# EAGLE board ATmega128RFA1-DevBoard (EAGLE 7.5.0)
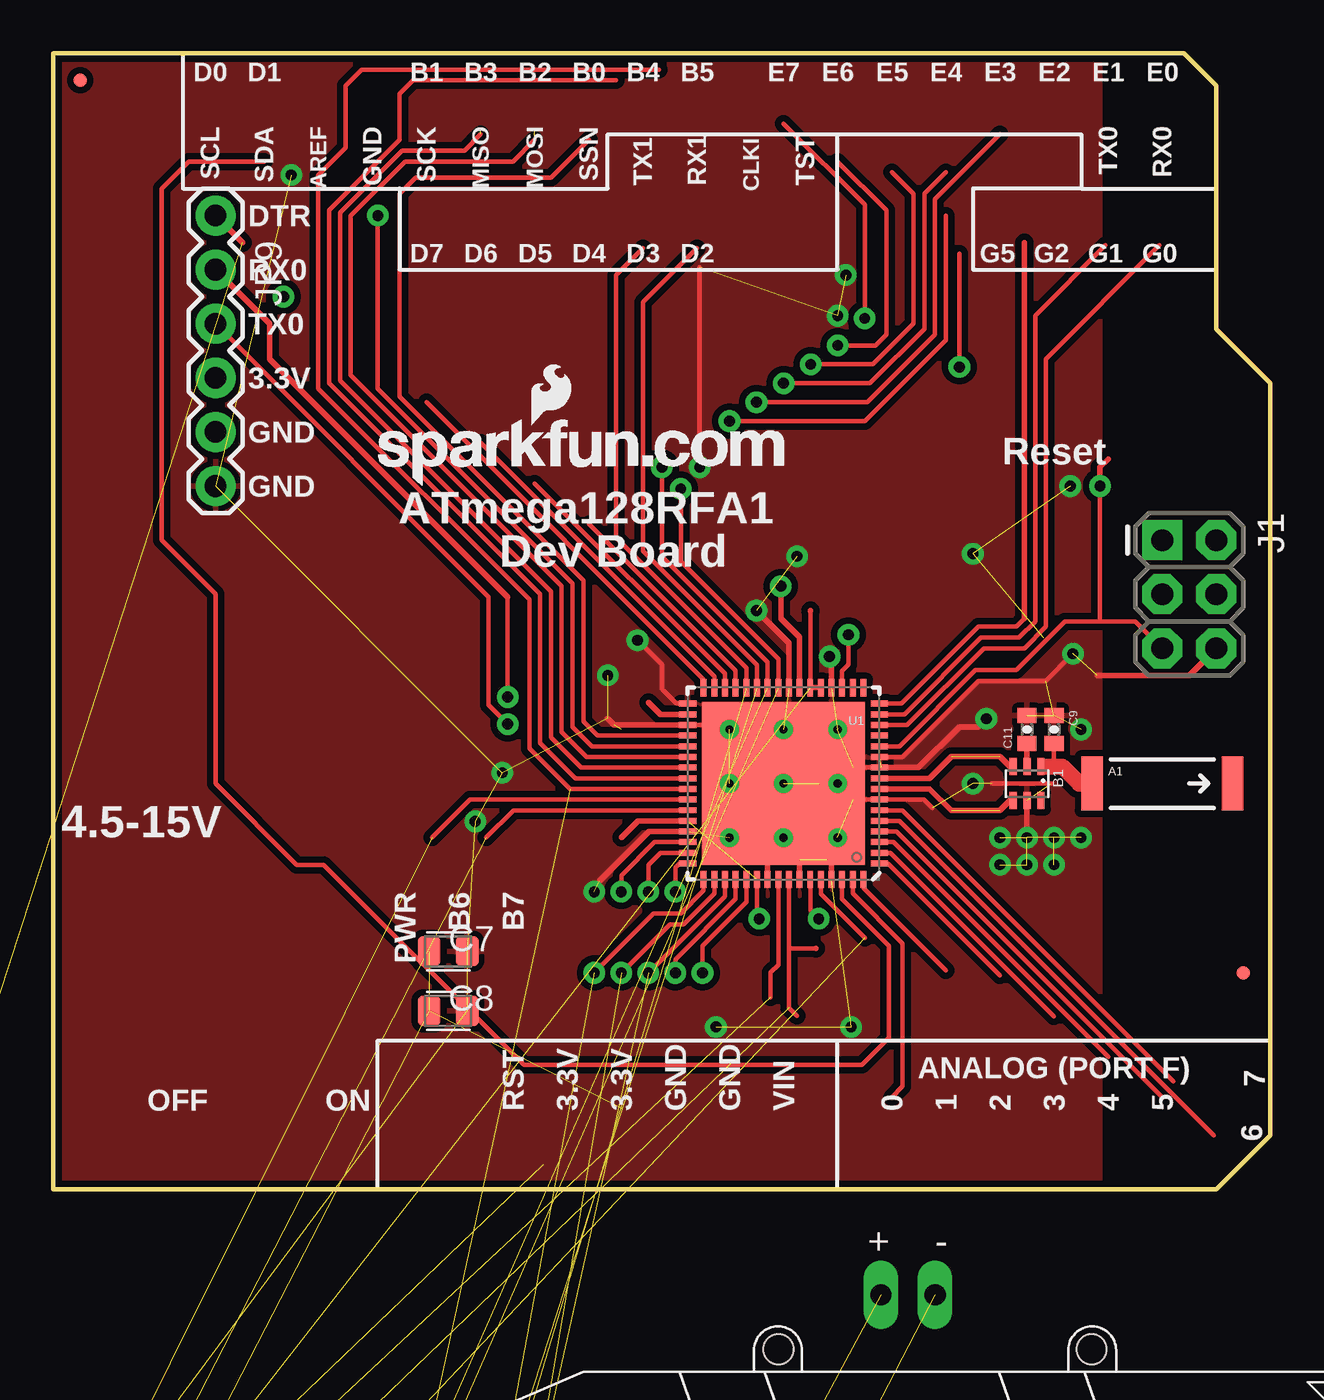
[diagram p0: board, top side]
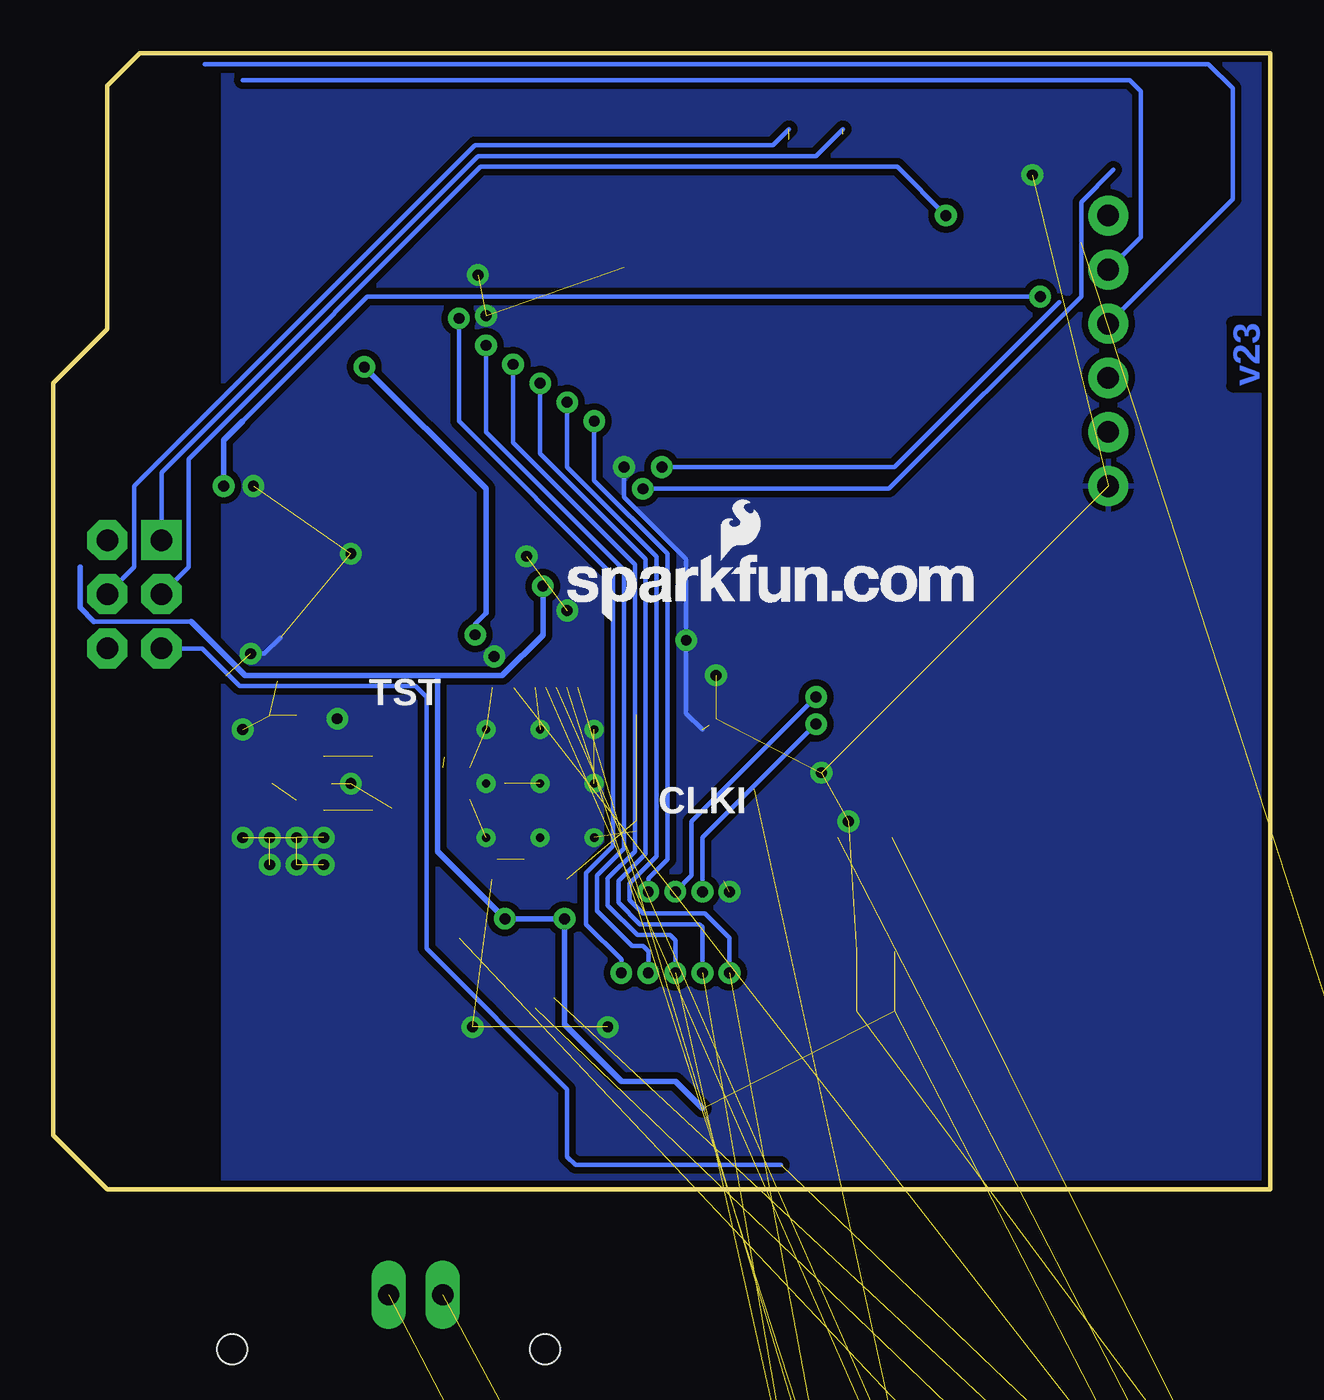
[diagram p1: board, bottom side, seen from below]

Size 57.15 x 53.34 mm. Coordinates in mm from the lower left corner, seen from the top.
Outline: 0,53.34 0,0 54.61,0 57.15,2.54 57.15,37.85 54.61,40.39 54.61,51.82 53.09,53.34 0,53.34
Copper layers (1*16): Top 0.035mm / dielectric 1.5mm / Bottom 0.035mm
Design rules "SparkFun": minimum track width 7mil, minimum drill 15mil, track to track 8mil, track to pad 8mil, pad to pad 8mil, via to via 8mil, smd to smd 8mil, copper to edge 8mil, drill to drill 8mil, minimum pad ring 12mil, minimum via ring 10mil, stop-mask expansion 4mil, vias tented up to drill 20mil, thermal gap 10mil
Net classes: 1 HighAmps: width 0.762 mm

## Footprints (pad centres in the part's own frame; a part is rotated, then mirrored left to right if it is on the bottom)
ANTENNA-CHIP5 = smd 1.016 x 2.54: FEED -3.302,0; NC 3.302,0
BALUN = smd 0.35 x 0.8: 1 -0.65,-0.8; 2 0,-0.8; 3 0.65,-0.8; 4 0.65,0.8; 5 0,0.8; 6 -0.65,0.8
BATTERY-W/HOLDER-380MAH-HUBSAN = drill 1 long: + -2.54,14.605; - 0,14.605 | hole 1.4: -7.35,-12.05; -7.35,12.05; 7.35,-12.05; 7.35,12.05
CAPC2012X140_HS = smd 1.08 x 1.42: 1 -0.895,0; 2 0.895,0
0402-CAP = smd 0.7 x 0.9: 1 -0.65,0; 2 0.65,0
C0402 = smd 0.635 x 0.635: 1 0,0.445; 2 0,-0.445
AVX-B = smd 1.143 x 2.286: + -1.46,0; - 1.46,0
C0603 = smd 0.889 x 0.889: 1 0,0.762; 2 0,-0.762
LEDSC125X200X120-2_HS = smd 0.94 x 0.99: A 1.045,0; C -1.045,0
DO-214AA = smd 2.159 x 2.743: + -2.21,0; - 2.21,0
MICRO-FIDUCIAL = smd 0.635 x 0.635: 1 0,0
2X3-NS = drill 1.016 pad 1.88 square: 1 -2.54,-1.27 | drill 1.016 pad 1.88 octagon: 2 -2.54,1.27; 3 0,-1.27; 4 0,1.27; 5 2.54,-1.27; 6 2.54,1.27
MALE_HEADER_2X1_0.1IN = drill 1.1 pad 1.65 square: 1 0,0 | drill 1.1 pad 1.65: 2 2.54,0
FTDI_BASIC = drill 1.016 pad 1.88: CTS 10.16,0; DTR 0,0; GND 12.7,0; RXI 2.54,0; TXO 5.08,0; VCC 7.62,0
MOTOR_PADS = smd 2 x 2: V+ -1,0; V- 2,0
SOT-23 = smd 1.016 x 1.143: 1 -0.889,-1.016; 2 0.889,-1.016; 3 0,1.016
RESC2012X60_HS = smd 0.92 x 1.38: 1 -0.955,0; 2 0.955,0
R0603 = smd 0.889 x 0.889: 1 0,0.762; 2 0,-0.762
QFN-64 = smd 0.8 x 0.28: 1 -4.5,3.75; 2 -4.5,3.25; 3 -4.5,2.75; 4 -4.5,2.25; 5 -4.5,1.75; 6 -4.5,1.25; 7 -4.5,0.75; 8 -4.5,0.25; 9 -4.5,-0.25; 10 -4.5,-0.75; 11 -4.5,-1.25; 12 -4.5,-1.75; 13 -4.5,-2.25; 14 -4.5,-2.75; 15 -4.5,-3.25; 16 -4.5,-3.75; 33 4.5,-3.75; 34 4.5,-3.25; 35 4.5,-2.75; 36 4.5,-2.25; 37 4.5,-1.75; 38 4.5,-1.25; 39 4.5,-0.75; 40 4.5,-0.25; 41 4.5,0.25; 42 4.5,0.75; 43 4.5,1.25; 44 4.5,1.75; 45 4.5,2.25; 46 4.5,2.75; 47 4.5,3.25; 48 4.5,3.75 | smd 0.28 x 0.8: 17 -3.75,-4.5; 18 -3.25,-4.5; 19 -2.75,-4.5; 20 -2.25,-4.5; 21 -1.75,-4.5; 22 -1.25,-4.5; 23 -0.75,-4.5; 24 -0.25,-4.5; 25 0.25,-4.5; 26 0.75,-4.5; 27 1.25,-4.5; 28 1.75,-4.5; 29 2.25,-4.5; 30 2.75,-4.5; 31 3.25,-4.5; 32 3.75,-4.5; 49 3.75,4.5; 50 3.25,4.5; 51 2.75,4.5; 52 2.25,4.5; 53 1.75,4.5; 54 1.25,4.5; 55 0.75,4.5; 56 0.25,4.5; 57 -0.25,4.5; 58 -0.75,4.5; 59 -1.25,4.5; 60 -1.75,4.5; 61 -2.25,4.5; 62 -2.75,4.5; 63 -3.25,4.5; 64 -3.75,4.5 | smd 7.65 x 7.65: 65 0,0
LGA-24_4X4MM = smd 0.3 x 0.6: P$1 1.25,1.8; P$2 0.75,1.8; P$3 0.25,1.8; P$4 -0.25,1.8; P$5 -0.75,1.8; P$6 -1.25,1.8; P$13 -1.25,-1.8; P$14 -0.75,-1.8; P$15 -0.25,-1.8; P$16 0.25,-1.8; P$17 0.75,-1.8; P$18 1.25,-1.8 | smd 0.6 x 0.3: P$7 -1.8,1.25; P$8 -1.8,0.75; P$9 -1.8,0.25; P$10 -1.8,-0.25; P$11 -1.8,-0.75; P$12 -1.8,-1.25; P$19 1.8,-1.25; P$20 1.8,-0.75; P$21 1.8,-0.25; P$22 1.8,0.25; P$23 1.8,0.75; P$24 1.8,1.25
SOT23-DBV = smd 0.55 x 1.2: 1 -0.95,-1.3; 2 0,-1.3; 3 0.95,-1.3; 4 0.95,1.3; 5 -0.95,1.3
SMD_RESISTOR = smd 0.7 x 1.25: P$1 -1,0; P$2 1,0
CRYSTAL-SMD-5X3 = smd 1.9 x 1.1: 1 -1.85,-1.15; 2 1.85,-1.15; 3 1.85,1.15; 4 -1.85,1.15

## Placement (x,y rotation side)
A1  ANTENNA2SMD5  [ANTENNA-CHIP5]  52.07,19.05 0 top
B1  748421245  [BALUN]  45.72,19.05 180 top
BATT1  BATTERY-HUBSAN-W/HOLDER  [BATTERY-W/HOLDER-380MAH-HUBSAN]  41.4,-19.56 0 top  (outside the outline)
C1  10uF  [CAPC2012X140_HS]  -16,-223.52 0 top  (outside the outline)
C2  10uF  [CAPC2012X140_HS]  -16,-226.31 0 top  (outside the outline)
C3  0.1uF  [CAPC2012X140_HS]  -16,-35.31 0 top  (outside the outline)
C4  12pF  [CAPC2012X140_HS]  -16,-38.1 0 top  (outside the outline)
C5  1uF  [CAPC2012X140_HS]  -16,-43.69 0 top  (outside the outline)
C6  1uF  [CAPC2012X140_HS]  -16,-46.48 0 top  (outside the outline)
C7  1uF  [CAPC2012X140_HS]  18.54,11.18 0 top
C8  1uF  [CAPC2012X140_HS]  18.54,8.38 0 top
C9  0.75pF  [0402-CAP]  46.99,21.59 270 top
C10  0.75pF  [CAPC2012X140_HS]  -16,-229.11 0 top  (outside the outline)
C11  22pF  [0402-CAP]  45.72,21.59 90 top
C14  22pF  [CAPC2012X140_HS]  -16,-231.9 0 top  (outside the outline)
C15  12pF  [CAPC2012X140_HS]  -16,-40.89 0 top  (outside the outline)
C16  1uF  [CAPC2012X140_HS]  -16,-234.7 0 top  (outside the outline)
C17  0.1uF  [CAPC2012X140_HS]  -16,-237.49 0 top  (outside the outline)
C18  0.01uF  [CAPC2012X140_HS]  -16,-80.77 0 top  (outside the outline)
C19  0.1uF  [CAPC2012X140_HS]  -16,-88.39 0 top  (outside the outline)
C20  10uF  [CAPC2012X140_HS]  -16,-91.19 0 top  (outside the outline)
C21  4.7uF  [CAPC2012X140_HS]  -16,-93.98 0 top  (outside the outline)
C22  0.22uF  [CAPC2012X140_HS]  -16,-96.77 0 top  (outside the outline)
C23  1uf  [C0402]  -6.86,-143.26 0 top  (outside the outline)
C24  100uf  [AVX-B]  -15.49,-144.02 0 top  (outside the outline)
C25  1uf  [C0603]  -15.75,-148.59 0 top  (outside the outline)
C26  1uf  [C0402]  -6.86,-165.1 0 top  (outside the outline)
C27  100uf  [AVX-B]  -15.49,-166.12 0 top  (outside the outline)
C28  1uf  [C0603]  -15.75,-170.69 0 top  (outside the outline)
C29  1uf  [C0402]  -6.86,-187.2 0 top  (outside the outline)
C30  100uf  [AVX-B]  -15.49,-188.21 0 top  (outside the outline)
C31  1uf  [C0603]  -15.75,-192.79 0 top  (outside the outline)
C32  1uf  [C0402]  -6.86,-209.3 0 top  (outside the outline)
C33  100uf  [AVX-B]  -15.49,-210.31 0 top  (outside the outline)
C34  1uf  [C0603]  -15.75,-214.88 0 top  (outside the outline)
D1  green  [LEDSC125X200X120-2_HS]  -15.49,-61.98 0 top  (outside the outline)
D2  green  [LEDSC125X200X120-2_HS]  -15.49,-64.77 0 top  (outside the outline)
D3  28V-5A  [DO-214AA]  -8.13,-130.3 0 top  (outside the outline)
D4  28V-5A  [DO-214AA]  -14.48,-153.42 0 top  (outside the outline)
D5  28V-5A  [DO-214AA]  -14.48,-175.51 0 top  (outside the outline)
D6  28V-5A  [DO-214AA]  -14.48,-197.61 0 top  (outside the outline)
FID1  FIDUCIALUFIDUCIAL  [MICRO-FIDUCIAL]  1.27,52.07 0 top
FID2  FIDUCIALUFIDUCIAL  [MICRO-FIDUCIAL]  55.88,10.16 0 top
J1  ISP  [2X3-NS]  53.34,27.94 270 top
J4  [MALE_HEADER_2X1_0.1IN]  -16,-106.93 0 top  (outside the outline)
JP1  FTDI (Serial Only)  [FTDI_BASIC]  -16.51,-123.19 0 top  (outside the outline)
JP4  LOGO-SFENEW  [SFE-NEW-WEBLOGO]  33.02,26.67 0 bottom
JP9  FTDI  [FTDI_BASIC]  7.62,45.72 270 top
JP10  LOGO-SFENEW  [SFE-NEW-WEBLOGO]  15.24,33.02 0 top
PIN_3  MOTOR_PADS  [MOTOR_PADS]  -10.41,-183.13 0 top  (outside the outline)
PIN_4  MOTOR_PADS  [MOTOR_PADS]  -10.41,-205.23 0 top  (outside the outline)
PIN_5  MOTOR_PADS  [MOTOR_PADS]  -10.41,-161.04 0 top  (outside the outline)
PIN_8  MOTOR_PADS  [MOTOR_PADS]  -5.59,-138.94 0 top  (outside the outline)
Q1  CJ2302  [SOT-23]  -15.49,-137.92 0 top  (outside the outline)
Q2  CJ2302  [SOT-23]  -8.64,-153.42 0 top  (outside the outline)
Q3  CJ2302  [SOT-23]  -8.64,-175.51 0 top  (outside the outline)
Q4  CJ2302  [SOT-23]  -8.64,-197.61 0 top  (outside the outline)
R1  10K  [RESC2012X60_HS]  -16,-99.57 0 top  (outside the outline)
R5  10K  [RESC2012X60_HS]  -16,-54.86 0 top  (outside the outline)
R6  10K  [RESC2012X60_HS]  -16,-102.36 0 top  (outside the outline)
R7  330  [RESC2012X60_HS]  -16,-49.28 0 top  (outside the outline)
R8  330  [RESC2012X60_HS]  -16,-52.07 0 top  (outside the outline)
R9  100R  [R0603]  -10.92,-142.75 0 top  (outside the outline)
R10  10K 1/10W  [R0603]  -10.67,-138.68 0 top  (outside the outline)
R11  100R  [R0603]  -10.92,-164.85 0 top  (outside the outline)
R12  10K 1/10W  [R0603]  -15.49,-160.78 0 top  (outside the outline)
R13  100R  [R0603]  -10.92,-186.94 0 top  (outside the outline)
R14  10K 1/10W  [R0603]  -15.49,-182.88 0 top  (outside the outline)
R15  100R  [R0603]  -10.92,-209.04 0 top  (outside the outline)
R16  10K 1/10W  [R0603]  -15.49,-204.98 0 top  (outside the outline)
U1  ATMEGA128RFA1  [QFN-64]  34.29,19.05 180 top
U$1  IMU  [LGA-24_4X4MM]  -15.24,-84.33 0 top  (outside the outline)
U$2  TPS73633-DBVT  [SOT23-DBV]  -15.49,-69.6 0 top  (outside the outline)
U$3  0  [SMD_RESISTOR]  -15.49,-116.33 0 top  (outside the outline)
Y2  [CRYSTAL-SMD-5X3]  -14.73,-58.42 0 top  (outside the outline)

## Library data of the parts
A1 B1 = SparkFun-RF
BATT1 = quadparts_prebuilt
C1 C2 C20 = quadparts_prebuilt; DIST: Digikey; DISTPN: 490-5523-1-ND; MFR: Murata Electronics North America; MPN: GRM21BR61E106KA73L
C3 C17 C19 = quadparts_prebuilt; DIST: Digikey; DISTPN: 490-1666-1-ND; MFR: Murata Electronics North America; MPN: GRM21BR71H104KA01L
C4 C15 = quadparts_prebuilt; DIST: Digikey; DISTPN: 490-5531-1-ND; MFR: Murata Electronics North America; MPN: GRM21A5C2E120JW01D
C5-C8 C16 = quadparts_prebuilt; DIST: Digikey; DISTPN: 490-4736-1-ND; MFR: Murata Electronics North America; MPN: GRM21BR71H105KA12L
C9 C11 = SparkFun-Passives
C10 = quadparts_prebuilt; DIST: Digikey; DISTPN: 490-3585-1-ND; MFR: Murata Electronics North America; MPN: GQM2195C2AR75CB01D
C14 = quadparts_prebuilt; DIST: Digikey; DISTPN: 490-5534-1-ND; MFR: Murata Electronics North America; MPN: GRM21A5C2E220JW01D
C18 = quadparts_prebuilt; DIST: Digikey; DISTPN: 490-8295-1-ND; MFR: Murata Electronics North America; MPN: GRM2195C1H103FA01D
C21 = quadparts_prebuilt; DIST: Digikey; DISTPN: 490-3335-1-ND; MFR: Murata Electronics North America; MPN: GRM21BR61E475KA12L
C22 = quadparts_prebuilt; DIST: Digikey; DISTPN: 490-1670-1-ND; MFR: Murata Electronics North America; MPN: GRM21BR71H224KA01L
C23 C26 C29 C32 = Seeed-Capacitor-2016; MPN: CC0402KRX5R6BB105
C24 C27 C30 C33 = Seeed-Capacitor-2016; MPN: TAJB107M010#NJ
C25 C28 C31 C34 = Seeed-Capacitor-2016; MPN: CC0603KRX7R8BB105
D1 D2 = quadparts_prebuilt; DIST: Digikey; DISTPN: 160-1179-1-ND; MFR: Lite-On Inc; MPN: LTST-C170GKT
D3-D6 = Seeed-Diode-2016; MPN: SS54B
FID1 FID2 JP4 JP10 = SparkFun-Aesthetics
J1 JP1 JP9 = SparkFun-Connectors
J4 = quadparts; CREATOR: SWANSON; DIST: Digikey; DISTPN: 3M9447-ND; MFR: 3M; MPN: 961102-6404-AR
PIN_3-PIN_5 PIN_8 = Andranik-Lab4
Q1-Q4 = Seeed-Transistor-2016; MPN: CJ2302
R1 R5 R6 = quadparts_prebuilt; DIST: Digikey; DISTPN: 311-10KARCT-ND; MFR: Yageo; MPN: RC0805JR-0710KL
R7 R8 = quadparts_prebuilt; DIST: Digikey; DISTPN: 311-330ARCT-ND; MFR: Yageo; MPN: RC0805JR-07330RL
R9 R11 R13 R15 = Seeed-Resistor-2016; MPN: RC0603JR-07100RL
R10 R12 R14 R16 = Seeed-Resistor-2016; MPN: RC0603JR-0710KL
U1 = SparkFun-DigitalIC
U$1 = quadparts; DIST: DIGIKEY; DISTPN: 497-13902-1-ND; MFP: LSM9DS0TR; MFR: STMicroelectronics
U$2 = quadparts_prebuilt; DATASHEET: http://www.ti.com/lit/ds/symlink/lp3985.pdf; DIST: Digikey; DISTPN: LP3985IM5X-3.0/NOPBCT-ND; MFR: Texas Instruments; MPN: LP3985IM5X-3.0/NOPB; PRICE: 0.59
U$3 = quadparts; DIST: DIGIKEY; DISTPN: 311-0.0ARCT-ND; MFR: Yageo; MPN: RC0805JR-070RL
Y2 = quadparts_prebuilt; DATASHEET: http://www.abracon.com/Resonators/abm3b.pdf; DIST: Digikey; DISTPN: 535-9122-1-ND; MFR: Abracon LLC; MPN: ABM3B-16.000MHZ-B2-T; PRICE: 0.68; PROD_ID: XTAL-08218

## Nets
3.3V: C2.1 C7.1 C8.1 C16.1 C19.1 C20.1 R1.1 R5.2 R6.1 U1.23 U1.34 U1.44 U1.54 U1.59 U$1.P$15 U$1.P$16 U$1.P$17 U$1.P$18 U$2.5
A0: U1.63
A1: U1.64
A2: U1.1
A3: U1.2
A4: U1.3
A5: U1.4
A6: U1.5
A7: U1.6
AREF: U1.62
AVDD: C6.1 U1.60
BAT_GND: BATT1.- C23.1 C24.- C26.1 C27.- C29.1 C30.- C32.1 C33.- Q1.2 Q2.2 Q3.2 Q4.2 R10.1 R12.1 R14.1 R16.1 U$3.P$1
DTR: C3.1 JP9.DTR
DVDD: C5.1 U1.21 U1.22
GND: B1.5 C1.2 C2.2 C4.2 C5.2 C6.2 C7.2 C8.2 C9.1 C11.2 C15.2 C16.2 C17.2 C18.2 C19.2 C20.2 C21.1 D1.C D2.C J1.6 JP1.GND JP9.GND U1.7 U1.10 U1.11 U1.20 U1.24 U1.33 U1.35 U1.45 U1.55 U1.58 U1.61 U1.65 U$1.P$2 U$1.P$3 U$1.P$4 U$1.P$5 U$1.P$6 U$1.P$22 U$1.P$23 U$2.2 U$3.P$2
MISO: J1.1 U1.39
MOSI: J1.4 U1.38
N$3: C15.1 U1.57 Y2.3
N$4: C4.1 U1.56 Y2.1
N$5: C18.1 U$2.4
N$6: C21.2 U$1.P$7
N$7: B1.2 C11.1
N$8: D2.A R7.1
N$12: C22.1 U$1.P$8
N$13: D1.A R8.1
N$14: C22.2 U$1.P$9
N$15: R1.2 U$1.P$19
N$16: R6.2 U$1.P$20
N$17: BATT1.+ J4.1
N$18: Q1.1 R9.2 R10.2
N$19 [HighAmps]: C25.1 D3.+ PIN_8.V- Q1.3
N$21: Q2.1 R11.2 R12.2
N$22 [HighAmps]: C28.1 D4.+ PIN_5.V- Q2.3
N$24: Q3.1 R13.2 R14.2
N$25 [HighAmps]: C31.1 D5.+ PIN_3.V- Q3.3
N$27: Q4.1 R15.2 R16.2
N$28 [HighAmps]: C34.1 D6.+ PIN_4.V- Q4.3
PB4: U1.40
PB5: C23.2 R9.1 U1.41
PB6: R7.2 U1.42
PB7: R8.2 U1.43
PD4: U1.29
PD5: U1.30
PD6: U1.31
PD7: U1.32
PE2: U1.48
PE3: C29.2 R13.1 U1.49
PE4: C32.2 R15.1 U1.50
PE5: C26.2 R11.1 U1.51
PE6: U1.52
PE7: U1.53
PG0: U1.14
PG1: U1.15
PG2: U1.16
PG5: U1.19
RESET: C3.2 J1.5 R5.1 U1.12
RFANT: A1.FEED B1.1 C9.2
RFN: B1.3 U1.9
RFP: B1.4 U1.8
RSTON: U1.13
RX0: JP9.TXO U1.46
RX1: JP1.RXI U1.27
SCK: J1.3 U1.37
SCL: U1.25 U$1.P$21
SDA: U1.26 U$1.P$24
SSN: U1.36
TX0: JP9.RXI U1.47
TX1: JP1.TXO U1.28
VCC: C1.1 C17.1 C24.+ C25.2 C27.+ C28.2 C30.+ C31.2 C33.+ C34.2 D3.- D4.- D5.- D6.- J4.2 PIN_3.V+ PIN_4.V+ PIN_5.V+ PIN_8.V+ U$2.1 U$2.3

## Tracks (layer width: path | path; a pad name or v marks a point on that pad's centre or on a via)
3.3V  (via drill 0.51)  (16 unrouted)
  Top 0.203: U1.54 33.04,12.81 v33.15,12.7 | U1.59 35.54,13.1 v35.94,12.7
  Top 0.254: U1.34 28.5,22.3 27.94,22.86 | U1.44 27.46,17.3 26.67,16.51 | U1.23 35.04,25.92 34.16,26.8 v34.16,28.32
  Bottom 0.203: 50.67,26.67 55.24,26.67
  Bottom 0.254: 39.12,24.13 39.12,15.88 v35.94,12.7 v33.15,12.7 33.15,7.75 30.48,5.08 27.94,5.08 26.67,3.81 | 39.12,24.13 36.07,24.13 34.16,26.04 v34.16,28.32 | 39.12,24.13 48.13,24.13 50.67,26.67 | 55.24,26.67 55.88,27.3 55.88,29.21
A0
  Top 0.203: 39.37,4.32 39.88,4.83 39.88,11.56 37.54,13.89 U1.63
A1
  Top 0.203: 41.91,10.29 38.04,14.16 U1.64
A2
  Top 0.203: U1.1 39.18,15.3 44.45,10.03
A3
  Top 0.203: U1.2 39.32,15.8 46.99,8.13
A4
  Top 0.203: U1.3 39.45,16.3 49.53,6.22
A5
  Top 0.203: U1.4 39.59,16.8 52.07,4.32
A6
  Top 0.203: U1.5 39.72,17.3 54.48,2.54
A7
  Top 0.203: U1.6 39.86,17.8 52.58,5.08
AREF
  Top 0.203: 9.91,48.26 6.35,48.26 5.08,46.99 5.08,30.48 7.62,27.94 7.62,19.05 11.43,15.24 12.7,15.24 22.1,5.84 37.97,5.84 39.24,7.11 39.24,11.43 37.04,13.63 U1.62
AVDD  (1 unrouted)
  Top 0.203: U1.60 36.04,13.87 38.1,11.81
BAT_GND  (17 unrouted)
DTR  (1 unrouted)
  Top 0.254: 8.89,44.45 JP9.DTR
DVDD  (1 unrouted)
  Top 0.203: U1.22 35.54,27.16
  Top 0.254: U1.21 U1.22 | 35.54,27.16 35.56,27.18
GND  (via drill 0.38, 0.51)  (62 unrouted)
  Top 0.203: 35.97,19.05 v36.83,19.05 37.58,18.3 U1.7 40.88,18.3 41.27,17.91 | v36.83,21.59 v34.29,21.59 v31.75,21.59 31.54,21.8 U1.35 | 36.32,15.49 36.32,16 v36.83,16.51 36.54,16.22 36.54,15.46 | 35.04,15.48 35.04,15.76 v34.29,16.51 | U1.10 37.58,19.8 | 46.86,19.05 44.07,19.05 | v30.35,33.91 30.35,43.31 | U1.33 29.27,22.8 28.57,23.5 28.57,24.64 v27.43,25.78 | U1.11 39.86,20.3 43.43,23.88 46.61,23.88 v47.88,25.15
  Top 0.254: 39.26,19.8 39.24,19.81 | U1.10 39.37,19.8 | 39.37,19.8 40.63,19.8 42.55,21.72 43.43,21.72 v43.81,22.1 | U1.61 36.54,15.46 | U1.58 35.04,15.48 | U1.55 33.54,15.48 34.29,16.23 v34.29,16.51 v31.75,16.51 | U1.24 34.54,25.66 v33.02,27.18 | U1.35 26.33,21.8 26.04,22.1 | U1.45 27.98,16.8 25.65,14.48 | 37.58,19.8 v36.83,19.05 | 38.86,19.81 39.24,19.81 | 39.36,19.81 40.13,19.81 | B1.5 v45.72,16.51 | J1.6 53.34,24.13 49.02,24.13 | U1.20 36.54,24.93 v36.45,25.02 | 39.24,19.81 39.36,19.81 | 39.36,19.81 39.37,19.8
  Bottom 0.203: 26.67,21.59 27.43,22.35 v27.43,25.78 27.43,29.59 30.35,32.51 v30.35,33.91 | v47.88,25.15 47.24,25.15 46.48,25.91
  other vias: 34.29,19.05 31.75,19.05 25.4,13.97 44.45,16.51 43.18,19.05 19.81,17.27 11.18,47.62 26.04,24.13 37.47,7.62 31.11,7.62 44.45,15.24 46.99,16.51 46.99,15.24 45.72,15.24 21.08,19.56 47.75,33.02 43.18,29.84 34.92,29.72 36.83,41.02 48.26,21.59 48.26,16.51 37.21,42.93
  pour Top (isolate 0.305, rank 2): 0,53.34 0,0 49.15,0 49.15,53.34
  pour Bottom (isolate 0.305): 0,53.34 49.15,53.34 49.15,0 0,0
MISO  (1 unrouted)
  Top 0.203: U1.39 24.78,19.8 23.37,21.21 23.37,28.07 13.46,37.97 13.46,45.85 16.38,48.77 19.3,48.77 20.07,49.53
  Bottom 0.203: J1.1 52.07,33.66 37.21,48.51 21.34,48.51 20.07,49.78
MOSI  (1 unrouted)
  Top 0.203: U1.38 25.04,20.3 23.88,21.46 23.88,28.32 13.97,38.23 13.97,45.72 16.51,48.26 21.59,48.26 22.61,49.28
  Bottom 0.203: J1.4 53.34,29.21 53.34,33.02 37.34,49.02 23.37,49.02 22.61,49.78
N$3  (2 unrouted)
  Top 0.203: U1.57 34.54,11.3 | 34.54,11.3 34.54,8.51 34.91,8.14 | 35.81,11.3 34.54,11.3
  Top 0.254: 35.82,11.31 35.81,11.3
N$4  (2 unrouted)
  Top 0.203: U1.56 34.04,10.54 33.67,10.18 33.67,9.02 33.66,9.01
N$5  (1 unrouted)
N$6  (1 unrouted)
N$7
  Top 0.254: B1.2 C11.1
N$8  (1 unrouted)
N$12  (1 unrouted)
N$13  (1 unrouted)
N$14  (1 unrouted)
N$15  (1 unrouted)
N$16  (1 unrouted)
N$17  (1 unrouted)
N$18  (2 unrouted)
N$19  (3 unrouted)
N$21  (2 unrouted)
N$22  (3 unrouted)
N$24  (2 unrouted)
N$25  (3 unrouted)
N$27  (2 unrouted)
N$28  (3 unrouted)
PB4
  Top 0.203: U1.40 24.52,19.3 22.86,20.95 22.86,27.94 12.95,37.85 12.95,45.97 16.26,49.28 16.26,51.44 16.89,52.07 26.42,52.07
PB5  (2 unrouted)
  Top 0.203: U1.41 24.25,18.8 22.35,20.7 22.35,27.69 12.45,37.59 12.45,47.62 13.72,48.9 13.72,51.82 14.48,52.58 28.45,52.58
PB6  (1 unrouted)
  Top 0.203: U1.42 19.57,18.3 17.78,16.51
PB7  (1 unrouted)
  Top 0.203: U1.43 21.61,17.8 20.32,16.51
PD4
  Top 0.203: U1.29 32.04,24.35 25.15,31.24
PD5
  Top 0.203: U1.30 31.54,24.21 22.61,33.15
PD6
  Top 0.203: U1.31 31.04,24.08 20.07,35.05
PD7
  Top 0.203: U1.32 30.54,23.94 17.53,36.96
PE2  (via drill 0.51)
  Top 0.203: v31.75,36.07 38.1,36.07 41.91,39.88 41.91,45.72 | v29.21,13.97 29.21,15.11 29.4,15.3 U1.48
  Bottom 0.203: v31.75,36.07 31.75,33.27 28.32,29.84 28.32,15.49 29.21,14.61 v29.21,13.97
PE3  (via drill 0.51)  (2 unrouted)
  Top 0.203: v33.02,36.96 38.23,36.96 41.4,40.13 41.4,46.48 44.45,49.53 | U1.49 30.54,14.03 29.46,12.95 28.19,12.95 v25.4,10.16
  Bottom 0.203: v25.4,10.16 25.4,11.81 26.54,12.95 29.46,12.95 30.1,13.59 30.1,14.35 28.83,15.62 28.83,29.72 33.02,33.91 v33.02,36.96
PE4  (via drill 0.51)  (2 unrouted)
  Top 0.203: v34.29,37.85 38.35,37.85 40.89,40.39 40.89,46.74 41.91,47.75 | U1.50 31.04,13.89 29.59,12.45 28.96,12.45 v26.67,10.16
  Bottom 0.203: v26.67,10.16 26.67,12.32 26.8,12.45 29.59,12.45 30.61,13.46 30.61,14.48 29.34,15.75 29.34,29.59 34.29,34.54 v34.29,37.85
PE5  (via drill 0.51)  (2 unrouted)
  Top 0.203: v35.56,38.73 38.48,38.73 40.39,40.64 40.39,46.74 39.37,47.75 | U1.51 31.54,13.76 v27.94,10.16
  Bottom 0.203: v27.94,10.16 27.94,11.68 28.19,11.94 29.72,11.94 31.11,13.34 31.11,14.61 29.84,15.88 29.84,29.34 35.56,35.05 v35.56,38.73
PE6  (via drill 0.51)
  Top 0.203: v36.83,39.62 38.61,39.62 39.12,40.13 39.12,45.97 36.83,48.26 | U1.52 32.04,13.62 29.21,10.79 v29.21,10.16
  Bottom 0.203: v36.83,39.62 36.83,35.56 30.35,29.08 30.35,16 31.62,14.73 31.62,13.08 29.97,11.43 29.46,11.43 29.21,11.18 v29.21,10.16
PE7  (via drill 0.51)
  Top 0.203: 34.29,50.04 38.1,46.23 v38.1,40.89 | U1.53 32.54,13.49 30.48,11.43 v30.48,10.16
  Bottom 0.203: v38.1,40.89 38.1,36.07 30.86,28.83 30.86,16.13 32.13,14.86 32.13,12.45 30.48,10.79 v30.48,10.16
PG0
  Top 0.203: U1.14 40.09,21.8 43.69,25.4 45.59,25.4 46.61,26.42 46.61,38.99 51.94,44.32
PG1
  Top 0.203: U1.15 39.95,22.3 43.56,25.91 45.34,25.91 46.1,26.67 46.1,41.02 49.4,44.32
PG2
  Top 0.203: U1.16 39.82,22.8 43.43,26.42 45.21,26.42 45.59,26.8
  Top 0.254: 45.59,26.8 45.59,44.45
PG5  (via drill 0.51)
  Top 0.203: U1.19 37.04,24.34 37.34,24.64 v37.34,26.04 | v42.55,38.61 42.55,43.94
  Bottom 0.203: v37.34,26.04 37.34,26.54 36.83,27.05
  Bottom 0.254: 36.83,27.05 36.83,32.89 v42.55,38.61
RESET  (via drill 0.51)  (2 unrouted)
  Top 0.203: U1.12 39.72,20.8 43.31,24.38 45.21,24.38 47.5,26.67 49.15,26.67 | J1.5 50.8,26.67 49.15,26.67 | v49.15,33.02 49.15,26.67
  Top 0.254: v49.15,33.02 49.15,33.91 49.53,34.29
  Bottom 0.203: 22.99,1.14 32.64,1.14 33.02,1.52 33.02,4.7 39.62,11.3 39.62,23.11 40.13,23.62 48.39,23.62 50.16,25.4 J1.5 | v10.81,41.91 42.42,41.91 48.26,36.07
  Bottom 0.254: 48.26,36.07 49.15,35.18 v49.15,33.02
RFANT
  Top 0.203: C9.2 46.99,19.85
  Top 0.254: B1.1 46.57,19.85
  Top 0.762: 46.57,19.85 46.99,19.85 47.37,19.85 48.17,19.05 A1.FEED
RFN  (1 unrouted)
  Top 0.254: U1.9 41.14,19.3 42.16,20.32 44.45,20.32 44.92,19.85 B1.3
RFP  (1 unrouted)
  Top 0.254: U1.8 41.14,18.8 42.16,17.78 44.45,17.78 44.92,18.25 B1.4
RX0  (via drill 0.51)
  Top 0.203: U1.46 28.24,16.3 26.67,14.73 v26.67,13.97 | JP9.TXO 20.45,27.81 20.45,22.73 v21.34,21.84
  Bottom 0.203: v26.67,13.97 26.67,16.51 v21.34,21.84 | 50.04,52.83 2.92,52.83 1.78,51.69 1.78,46.48 JP9.TXO
RX1  (1 unrouted)
  Top 0.203: U1.27 33.04,24.62 27.69,29.97 27.69,41.66 30.23,44.2
SCK  (via drill 0.51)
  Top 0.203: U1.37 25.3,20.8 24.38,21.72 24.38,28.45 15.24,37.59 v15.24,45.72
  Bottom 0.203: v15.24,45.72 17.53,48.01 37.08,48.01 50.8,34.29 50.8,29.21 J1.3
SCL  (via drill 0.51)  (1 unrouted)
  Top 0.203: U1.25 34.04,24.89 29.46,29.46 v29.46,32.89
  Bottom 0.203: v29.46,32.89 17.91,32.89 8.89,41.91 8.89,46.35 7.37,47.88
SDA  (via drill 0.51)  (1 unrouted)
  Top 0.203: U1.26 33.54,24.75 28.57,29.72 v28.57,33.91
  Bottom 0.203: v28.57,33.91 17.65,33.91 9.91,41.66
SSN
  Top 0.203: U1.36 25.56,21.3 24.89,21.97 24.89,28.57 16.26,37.21 16.26,46.74 17.02,47.5 23.37,47.5 25.15,49.28
TX0  (via drill 0.51)
  Top 0.203: U1.47 28.5,15.8 27.94,15.24 v27.94,13.97 | v21.34,23.11 21.34,27.81
  Top 0.254: 21.34,27.81 10.16,38.99 10.16,40.64 JP9.RXI
  Bottom 0.203: JP9.RXI 6.1,44.7 6.1,51.56 6.6,52.07 48.26,52.07 | v27.94,13.97 27.18,14.73 27.18,17.27 v21.34,23.11
TX1  (1 unrouted)
  Top 0.203: U1.28 32.54,24.48 26.42,30.61 26.42,42.93 27.69,44.2
VCC  (20 unrouted)

## Text on the board
Bottom: v23
tPlace: D0 | D1 | B1 | B3 | B2 | B0 | B4 | B5 | E7 | E6 | E5 | E4 | E3 | E2 | E1 | E0 | SCL | SDA | AREF | GND | SCK | MISO | MOSI | SSN | TX0 | RX0 | TX1 | RX1 | CLKI | TST | DTR | D7 | D6 | D5 | D4 | D3 | D2 | G5 | G2 | G1 | G0 | RX0 | TX0 | 3.3V | GND | Reset | GND | ATmega128RFA1 | Dev Board | 4.5-15V | PWR | B6 | B7 | ANALOG (PORT F) | 7 | OFF | ON | RST | 3.3V | 3.3V | GND | GND | VIN | 0 | 1 | 2 | 3 | 4 | 5 | 6
bPlace: TST | CLKI